# EAGLE board base (EAGLE 9.2.0)
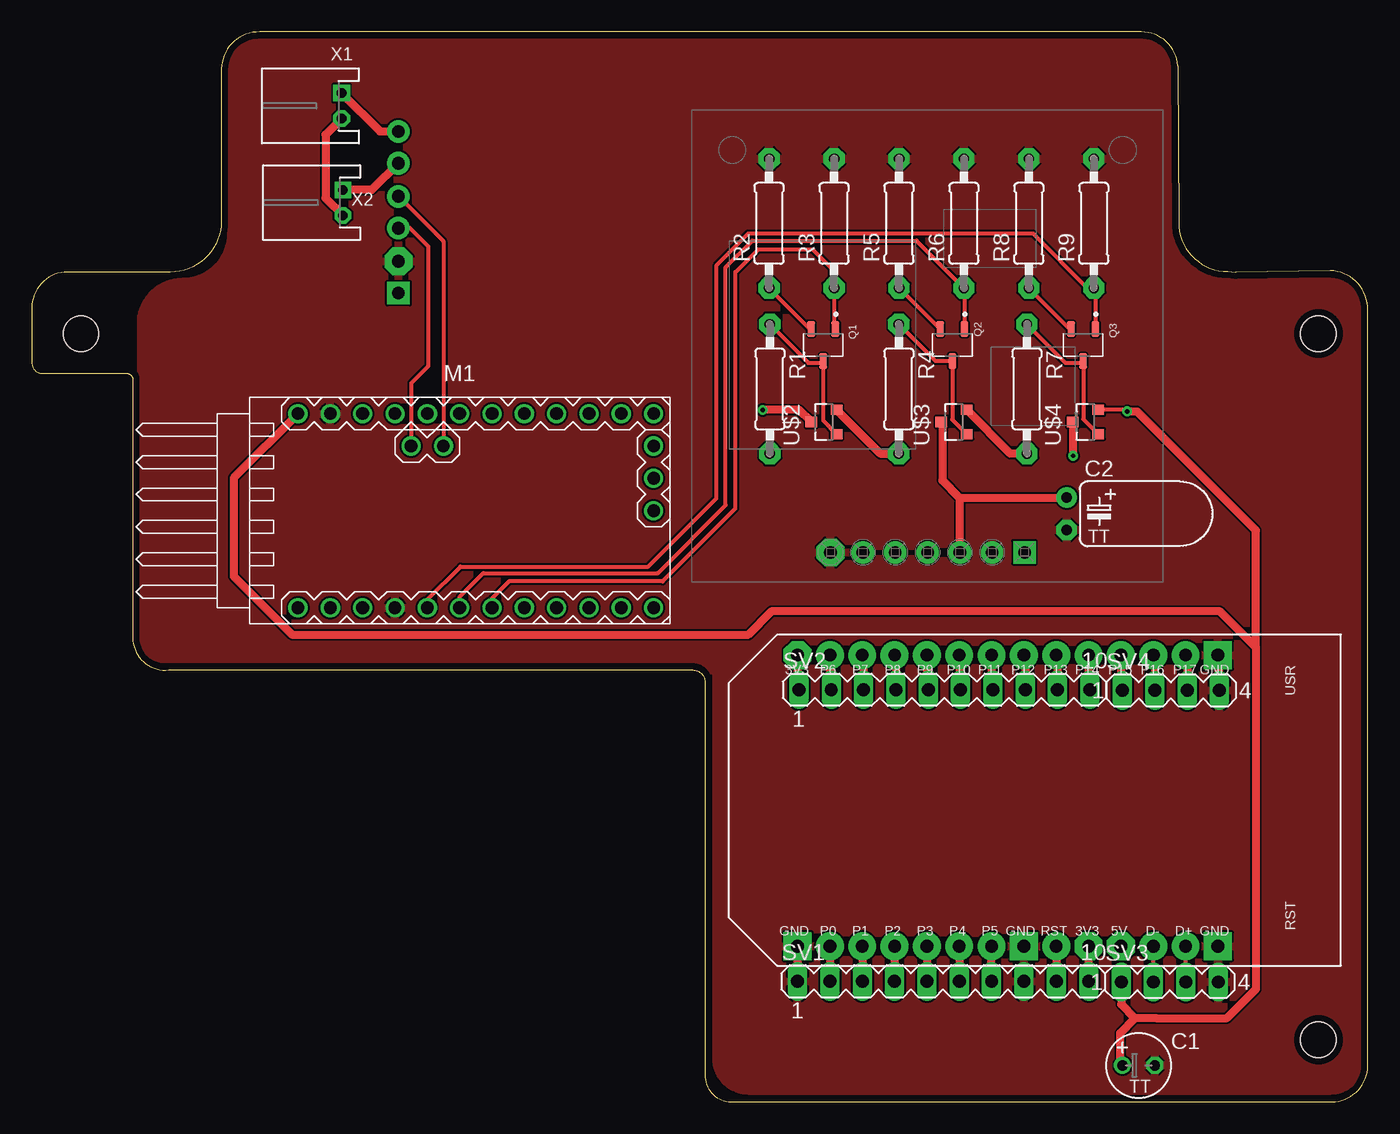
[diagram p0: board, top side]
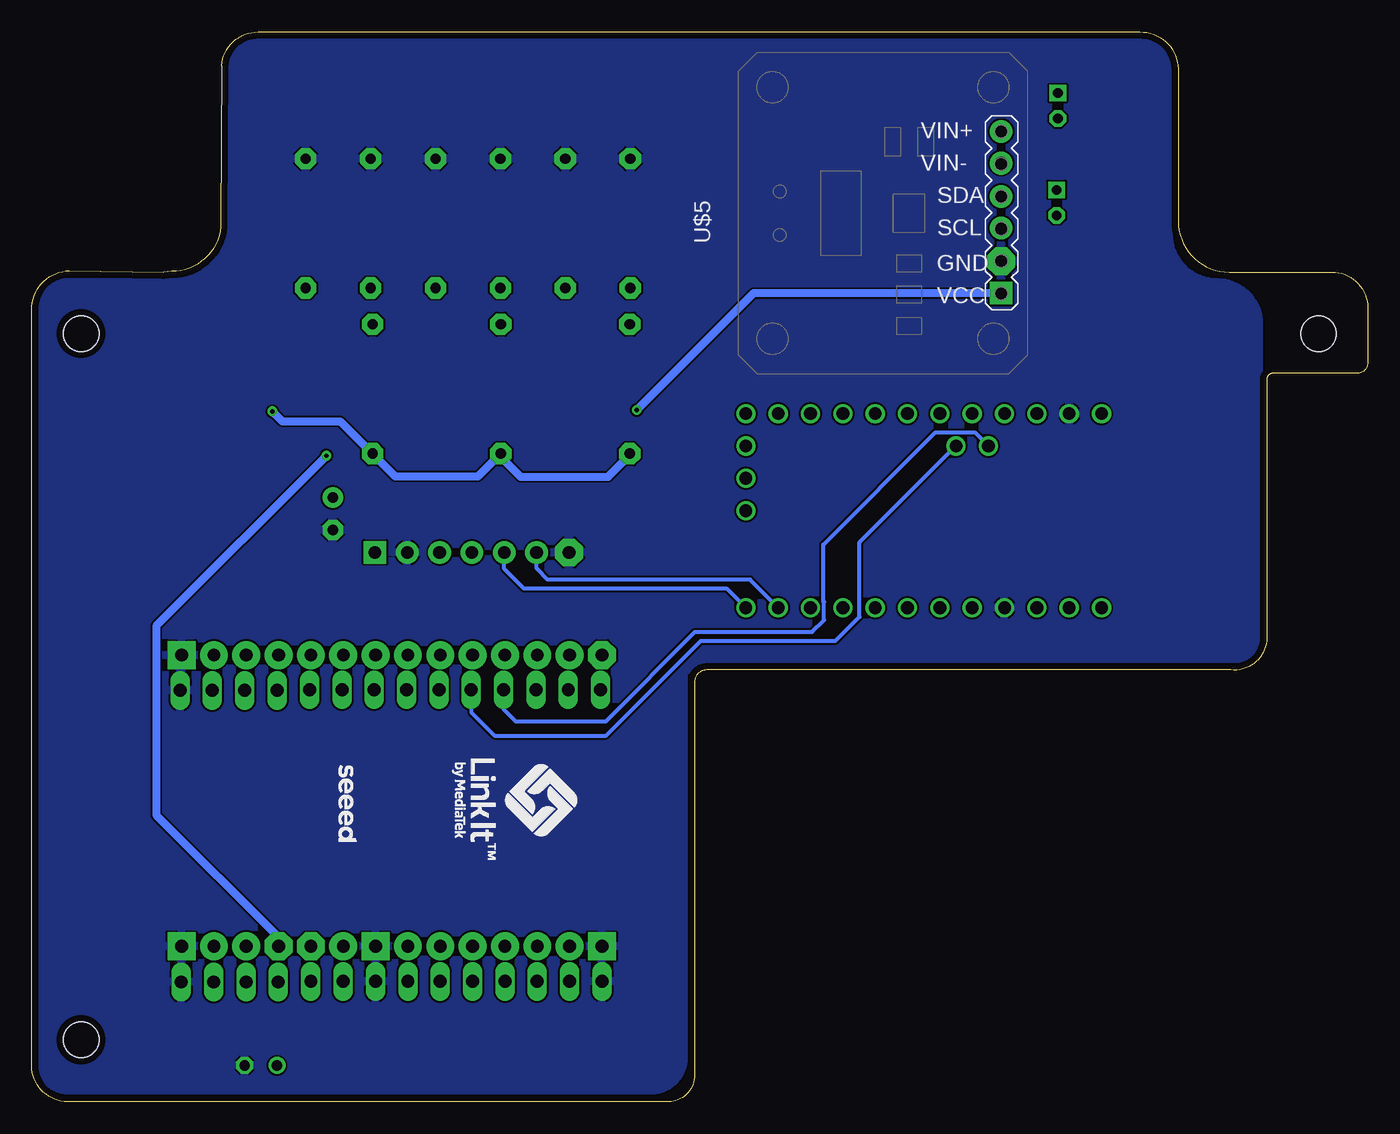
[diagram p1: board, bottom side, seen from below]

Size 104.94 x 84.01 mm. Coordinates in mm from the lower left corner, seen from the top.
Outline: 3.29,65.15 3.24,65.15
Outline: 3.24,65.15 2.81,65.15 arc90 0,62.34 0,58.02 arc90 0.82,57.2 7.44,57.2 arc-90 7.94,56.7 7.94,36.2 arc90 10.74,33.9 51.94,33.9 arc-90 52.89,32.9 52.89,2.3 arc90 54.74,0 102.14,0 arc90 104.94,2.8 104.94,62.2 arc90 101.99,65.25 94.59,65.15 93.94,65.2 arc-90 90.09,69.05 90.04,81.35 arc90 86.89,84 17.89,84 arc90 14.89,81.1 14.89,69.15 arc-90 10.89,65.15 3.24,65.15
Copper layers (1*16): Top 0.035mm / dielectric 1.5mm / Bottom 0.035mm
Design rules "default *": minimum track width 12mil, minimum drill 0.35mm, track to track 6mil, track to pad 6mil, pad to pad 6mil, via to via 6mil, smd to smd 6mil, copper to edge 20mil, drill to drill 6mil, minimum pad ring 10mil, minimum via ring 8mil, stop-mask expansion 6mil, vias tented up to drill 0mil, thermal gap 6mil
Holes 2.8 mm at 3.86,60.31 101.07,60.31 101.07,4.86

## Footprints (pad centres in the part's own frame; a part is rotated, then mirrored left to right if it is on the bottom)
TT2D5 = drill 0.813: + -1.27,0 | drill 0.813 octagon: - 1.27,0
TT2D5L = drill 0.813 pad 1.6: + -1.27,0 | drill 0.813 pad 1.6 octagon: - 1.27,0
ARDUINO-PRO-MINI#APC = drill 1: J2.1 -1.27,5.08; J2.2 -3.81,5.08; J3.1 15.24,0; J3.2 15.24,2.54; J3.3 15.24,5.08; J6.1 -12.7,7.62; J6.2 -10.16,7.62; J6.3 -7.62,7.62; J6.4 -5.08,7.62; J6.5 -2.54,7.62; J6.6 0,7.62; J6.7 2.54,7.62; J6.8 5.08,7.62; J6.9 7.62,7.62; J6.10 10.16,7.62; J6.11 12.7,7.62; J6.12 15.24,7.62; J7.1 15.24,-7.62; J7.2 12.7,-7.62; J7.3 10.16,-7.62; J7.4 7.62,-7.62; J7.5 5.08,-7.62; J7.6 2.54,-7.62; J7.7 0,-7.62; J7.8 -2.54,-7.62; J7.9 -5.08,-7.62; J7.10 -7.62,-7.62; J7.11 -10.16,-7.62; J7.12 -12.7,-7.62
SOT95P280X125-3N = smd 1.21 x 0.59: 1 -1.255,0.95; 2 -1.255,-0.95; 3 1.255,0
0207/10 = drill 0.813 pad 1.676 octagon: 1 -5.08,0; 2 5.08,0
MA10-1 = drill 1.016 long: 1 -11.43,0; 2 -8.89,0; 3 -6.35,0; 4 -3.81,0; 5 -1.27,0; 6 1.27,0; 7 3.81,0; 8 6.35,0; 9 8.89,0; 10 11.43,0
MA04-1 = drill 1.016 long: 1 -3.81,0; 2 -1.27,0; 3 1.27,0; 4 3.81,0
LINKIT_7697 = drill 1 pad 2.184 octagon: 3V3_1 1.524,19.812; 3V3_2 24.384,42.672; 5V 1.524,17.272 | drill 1 pad 2.184: D+ 1.524,12.192; D- 1.524,14.732; P0 1.524,40.132; P1 1.524,37.592; P2 1.524,35.052; P3 1.524,32.512; P4 1.524,29.972; P5 1.524,27.432; P6 24.384,40.132; P7 24.384,37.592; P8 24.384,35.052; P9 24.384,32.512; P10 24.384,29.972; P11 24.384,27.432; P12 24.384,24.892; P13 24.384,22.352; P14 24.384,19.812; P15 24.384,17.272; P16 24.384,14.732; P17 24.384,12.192; RST 1.524,22.352 | drill 1 pad 2.184 square: GND_1 1.524,9.652; GND_2 1.524,24.892; GND_3 1.524,42.672; GND_4 24.384,9.652
SOT23 = smd 0.8 x 0.9: 1 -0.95,-1; 2 0.95,-1; 3 0,1
ADAFRUIT_INA219_H = drill 1 pad 2.184 octagon: GND -3.806,-7.585 | drill 1 pad 1.778: SCL -1.206,-7.585; SDA 1.294,-7.585; VIN+ 6.394,-7.585; VIN- 3.894,-7.585 | drill 1 pad 1.778 square: VCC -6.306,-7.585
SIM7000E_AND-GLOBAL = drill 1 pad 1.778: PW 1.524,17.018; RX 6.604,17.018; TX 4.064,17.018; V_GND -3.556,17.018; VCC -1.016,17.018 | drill 1 pad 2.184 octagon: S_GND 9.144,17.018 | drill 1 pad 1.778 square: SLEEP -6.096,17.018
S2B-PH-K-S = drill 0.75 pad 1.3 square: 1 1,0 | drill 0.75 pad 1.3 octagon: 2 -1,0

## Placement (x,y rotation side)
C1  500uF  [TT2D5]  86.95,2.85 0 top
C2  1000uF  [TT2D5L]  81.3,46.17 270 top
M1  ARDUINO-PRO-MINI-3.3V#APC  [ARDUINO-PRO-MINI#APC]  33.61,46.41 0 top
Q1  AO3402  [SOT95P280X125-3N]  62.17,59.42 270 top
Q2  AO3402  [SOT95P280X125-3N]  72.31,59.42 270 top
Q3  AO3402  [SOT95P280X125-3N]  82.59,59.42 270 top
R1  10K  [0207/10]  57.98,55.97 270 top
R2  10K  [0207/10]  57.92,68.97 90 top
R3  1M  [0207/10]  63.02,68.97 90 top
R4  10K  [0207/10]  68.11,55.97 270 top
R5  10K  [0207/10]  68.12,68.97 90 top
R6  1M  [0207/10]  73.22,68.97 90 top
R7  10K  [0207/10]  78.17,55.97 270 top
R8  10K  [0207/10]  78.32,68.97 90 top
R9  1M  [0207/10]  83.43,68.97 90 top
SV1  [MA10-1]  71.59,9.45 0 top
SV2  [MA10-1]  71.69,32.35 0 top
SV3  [MA04-1]  89.39,9.4 0 top
SV4  [MA04-1]  89.49,32.3 0 top
U$1  LINKIT_7697  [LINKIT_7697]  102.82,10.68 90 top
U$2  AO3403_STO-23  [SOT23]  62.22,53.37 90 top
U$3  AO3403_STO-23  [SOT23]  72.44,53.37 90 top
U$4  AO3403_STO-23  [SOT23]  82.76,53.37 90 top
U$5  ADAFRUIT_INA219_H  [ADAFRUIT_INA219_H]  36.39,69.8 90 bottom
U$6  SIM7000E  [SIM7000E_AND-GLOBAL]  71.89,60.15 180 top
X1  S2B-PH-K-S  [S2B-PH-K-S]  24.34,78.2 90 top
X2  S2B-PH-K-S  [S2B-PH-K-S]  24.44,70.6 90 top

## Library data of the parts
C1 C2 = rcl; SPICEPREFIX: C
M1 = diy-modules
Q1-Q3 = AO340x; AVAILABILITY: Unavailable; DESCRIPTION: N-Channel 30V 4A _Ta_ 1.4W _Ta_ Surface Mount SOT-23-3L; MF: Alpha &; MP: AO3402; PACKAGE: SOT-23 Alpha &amp; Omega Semiconductor; PRICE: None
R1-R9 = adafruit
SV1-SV4 = con-lstb; OC_FARNELL: unknown; OC_NEWARK: unknown
U$1 = MCU
U$2-U$4 = AO340x
U$5 U$6 = GAIA_SedimentCurrentFlowBox
X1 X2 = con-JST PH

## Nets
3V3: M1.J6.4
5V: C1.+ M1.J6.1 R1.2 R4.2 R7.2 SV3.1 U$2.2 U$3.2 U$4.2
BAT_GND: X1.2 X2.2
CTRL_7697: M1.J7.8 Q3.1 R9.1
CTRL_INA219: M1.J7.6 Q1.1 R3.1
CTRL_SIM7000E: M1.J7.7 Q2.1 R6.1
GND: C1.- C2.- M1.J6.2 M1.J7.9 R2.2 R3.2 R5.2 R6.2 R8.2 R9.2 SV1.1 SV1.8 SV3.4 SV4.4 U$1.GND_1 U$1.GND_2 U$1.GND_3 U$1.GND_4 U$5.GND U$6.S_GND U$6.V_GND
N$1: Q1.2 R2.1
N$2: Q1.3 R1.1 U$2.1
N$3: Q2.2 R5.1
N$4: Q2.3 R4.1 U$3.1
N$5: Q3.2 R8.1
N$6: Q3.3 R7.1 U$4.1
N$8: SV1.2 U$1.P0
N$9: SV1.3 U$1.P1
N$10: SV1.4 U$1.P2
N$11: SV1.5 U$1.P3
N$12: SV1.6 U$1.P4
N$13: SV1.7 U$1.P5
N$15: SV1.9 U$1.RST
N$16: SV1.10 U$1.3V3_1
N$17: SV3.2 U$1.D-
N$18: SV3.3 U$1.D+
N$21: SV4.3 U$1.P17
N$22: SV4.2 U$1.P16
N$23: SV4.1 U$1.P15
N$24: SV2.10 U$1.P14
N$25: SV2.9 U$1.P13
N$26: SV2.8 U$1.P12
N$27: SV2.7 U$1.P11
N$28: SV2.6 U$1.P10
N$31: SV2.3 U$1.P7
N$32: SV2.2 U$1.P6
N$33: SV2.1 U$1.3V3_2
NBIOT_RX: M1.J7.2 U$6.RX
NBIOT_TX: M1.J7.1 U$6.TX
SCL: M1.J2.2 SV2.4 U$1.P8 U$5.SCL
SDA: M1.J2.1 SV2.5 U$1.P9 U$5.SDA
VCC_7697: U$1.5V U$4.3
VCC_INA219: U$2.3 U$5.VCC
VCC_SIM7000E: C2.+ U$3.3 U$6.VCC
VIN+: U$5.VIN+ X1.1
VIN-: U$5.VIN- X2.1

## Tracks (layer width: path | path; a pad name or v marks a point on that pad's centre or on a via)
5V  (via drill 0.35)
  Top 0.305: v86.05,54.21 85.94,54.32 U$4.2
  Top 0.61: U$2.2 66.66,50.89 R4.2 | U$3.2 76.87,50.89 R7.2 | 88.29,6.55 93.88,6.55 96.16,8.84 96.16,35.67 | 88.29,6.55 | 88.29,6.55 88.27,6.55 86.66,6.55 | 86.66,6.55 85.58,7.64 SV3.1 | M1.J6.1 15.87,48.99 15.87,41.26 20.44,36.68 56.29,36.68 58.1,38.49 93.34,38.49 96.16,35.67 | v86.05,54.21 86.81,54.21 96.16,44.86 96.16,35.67 | C1.+ arc-90 85.5,3.03 85.5,5.39 86.66,6.55
  Bottom 0.305: R1.2 57.98,50.76
  Bottom 0.61: 57.98,50.76 59.67,49.07 66.54,49.07 68.11,50.64 R4.2 69.88,49.11 76.39,49.11 R7.2 80.7,53.43 85.26,53.43 v86.05,54.21
BAT_GND
  Top 0.61: X1.2 23.08,75.94 23.08,70.96 X2.2
CTRL_7697
  Top 0.305: M1.J7.8 31.07,39.4 33.68,42.02 48.41,42.02 53.75,47.35 53.75,65.64 56.29,68.18 78.64,68.18 82.93,63.89 R9.1 83.54,63.78 Q3.1
CTRL_INA219
  Top 0.305: M1.J7.6 36.15,39.53 37.49,40.86 49.55,40.86 55.27,46.59 55.27,65.13 57.05,66.91 61.37,66.91 63.02,65.26 R3.1 63.02,60.77 Q1.1
CTRL_SIM7000E
  Top 0.305: Q2.1 73.26,63.85 R6.1 69.49,67.62 56.61,67.62 54.51,65.52 54.51,46.84 49.17,41.51 35.46,41.51 33.61,39.66 M1.J7.7
GND
  Top 0.61: U$1.GND_3 SV1.1 | SV4.4 93.3,34.94 U$1.GND_4
  pour Top: 86.46,83.73 41.43,83.73 18.15,83.38 arc90 15.65,80.88 15.65,68.18 arc-90 11.84,64.37 arc90 8.53,61.07 8.53,35.92 arc90 10.57,33.89 53.75,33.89 53.75,3.41 arc90 56.29,0.87 102.01,0.87 arc90 104.55,3.41 104.55,61.83 arc90 102.01,64.37 94.39,64.37 arc-90 89.31,69.45 89.31,80.88 arc90
  pour Bottom: 15.65,80.88 15.65,68.18 arc-90 11.84,64.37 arc90 8.53,61.07 8.53,35.92 arc90 10.57,33.89 53.75,33.89 53.75,3.41 arc90 56.29,0.87 102.01,0.87 arc90 104.55,3.41 104.55,61.83 arc90 102.01,64.37 94.39,64.37 arc-90 89.31,69.45 89.31,80.88 arc90 86.77,83.42 18.19,83.42 arc90
N$1
  Top 0.305: R2.1 61.13,60.67 Q1.2
N$2
  Top 0.305: U$2.1 62.17,53.48 62.17,58.02 | Q1.3 62.17,58.02 | R1.1 61.01,58.02 62.17,58.02
N$3
  Top 0.305: R5.1 68.14,63.89 Q2.2
N$4
  Top 0.305: R4.1 70.99,58.16 Q2.3 72.31,53.55 U$3.1
N$5
  Top 0.305: R8.1 81.54,60.67 Q3.2
N$6
  Top 0.305: U$4.1 82.59,53.6 82.59,58.02 | Q3.3 82.59,58.02 | 82.59,58.02 82.19,58.02 81.2,58.02 R7.1
N$8
  Top 0.61: U$1.P0 SV1.2
N$9
  Top 0.61: U$1.P1 SV1.3
N$10
  Top 0.61: U$1.P2 SV1.4
N$11
  Top 0.61: U$1.P3 SV1.5
N$12
  Top 0.61: U$1.P4 SV1.6
N$13
  Top 0.61: SV1.7 U$1.P5
N$15
  Top 0.61: U$1.RST SV1.9
N$16
  Top 0.61: U$1.3V3_1 SV1.10
N$17
  Top 0.305: SV3.2 88.12,12.18 U$1.D-
N$18
  Top 0.305: SV3.3 90.66,12.18 U$1.D+
N$21
  Top 0.61: U$1.P17 90.76,34.94 SV4.3
N$22
  Top 0.61: U$1.P16 88.22,34.94 SV4.2
N$23
  Top 0.61: U$1.P15 85.55,32.42 SV4.1
N$24
  Top 0.61: U$1.P14 83.01,32.45 SV2.10
N$25
  Top 0.61: U$1.P13 80.58,34.96 SV2.9
N$26
  Top 0.61: U$1.P12 78.04,34.96 SV2.8
N$27
  Top 0.61: U$1.P11 75.39,32.45 SV2.7
N$28
  Top 0.61: U$1.P10 72.85,32.45 SV2.6
N$31
  Top 0.61: U$1.P7 65.34,34.96 SV2.3
N$32
  Top 0.61: U$1.P6 62.69,32.45 SV2.2
N$33
  Top 0.61: U$1.3V3_2 60.15,32.45 SV2.1
NBIOT_RX
  Bottom 0.305: M1.J7.2 48.52,41 64.41,41 65.28,41.87 U$6.RX
NBIOT_TX
  Bottom 0.305: M1.J7.1 50.37,40.31 66.3,40.31 67.82,41.84 U$6.TX
SCL
  Top 0.305: U$5.SCL 29.71,68.59 31.14,67.16 31.14,57.77 29.8,56.42 M1.J2.2
  Top 0.61: U$1.P8 67.88,34.96 SV2.4
  Bottom 0.305: 42.77,43.74 | 42.77,43.74 33.95,52.55 30.86,52.55 M1.J2.2 | SV2.4 67.88,30.83 66.9,29.85 59.86,29.85 52.83,36.89 43.64,36.89 42.71,37.82 42.71,39.23 42.77,39.29 42.77,43.74
SDA
  Top 0.305: U$5.SDA 32.34,67.56 M1.J2.1
  Top 0.61: U$1.P9 70.31,32.45 SV2.5
  Bottom 0.305: SV2.5 70.42,30.59 68.57,28.74 59.81,28.74 52.38,36.18 41.81,36.18 39.91,38.07 39.91,43.91 M1.J2.1
VCC_7697  (via drill 0.35)
  Top 0.305: v81.79,50.72 81.76,50.72
  Top 0.61: U$4.3 81.76,50.72
  Bottom 0.61: v81.79,50.72 95.15,37.36 95.15,22.51 85.55,12.91 U$1.5V
VCC_INA219  (via drill 0.35)
  Top 0.61: U$2.3 60.28,54.32 v57.41,54.32
  Bottom 0.61: v57.41,54.32 48.24,63.49 U$5.VCC
VCC_SIM7000E
  Top 0.61: U$3.3 71.52,53.3 71.52,48.79 72.86,47.44 | 72.86,47.44 C2.+ | U$6.VCC 72.9,47.4 72.86,47.44
VIN+
  Top 0.61: X1.1 27.34,76.19 U$5.VIN+
VIN-
  Top 0.61: U$5.VIN- 26.71,71.6 X2.1

## Text on the board
tTest: WaterBox / V2.1_Pro